# EAGLE board IBB v1.0 (EAGLE 7.5.0)
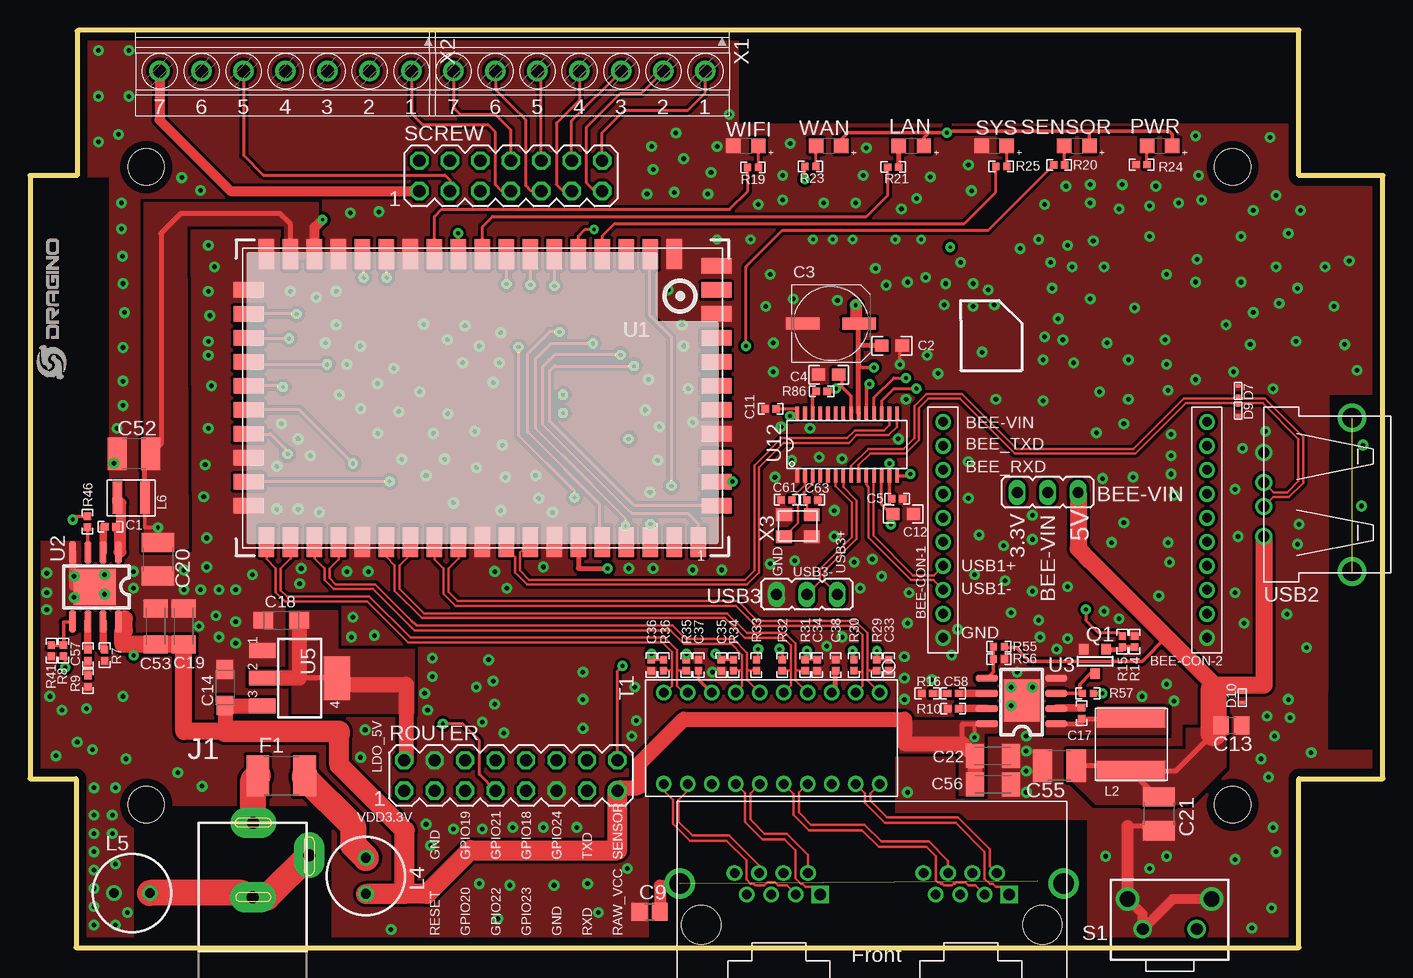
[diagram p0: board, top side]
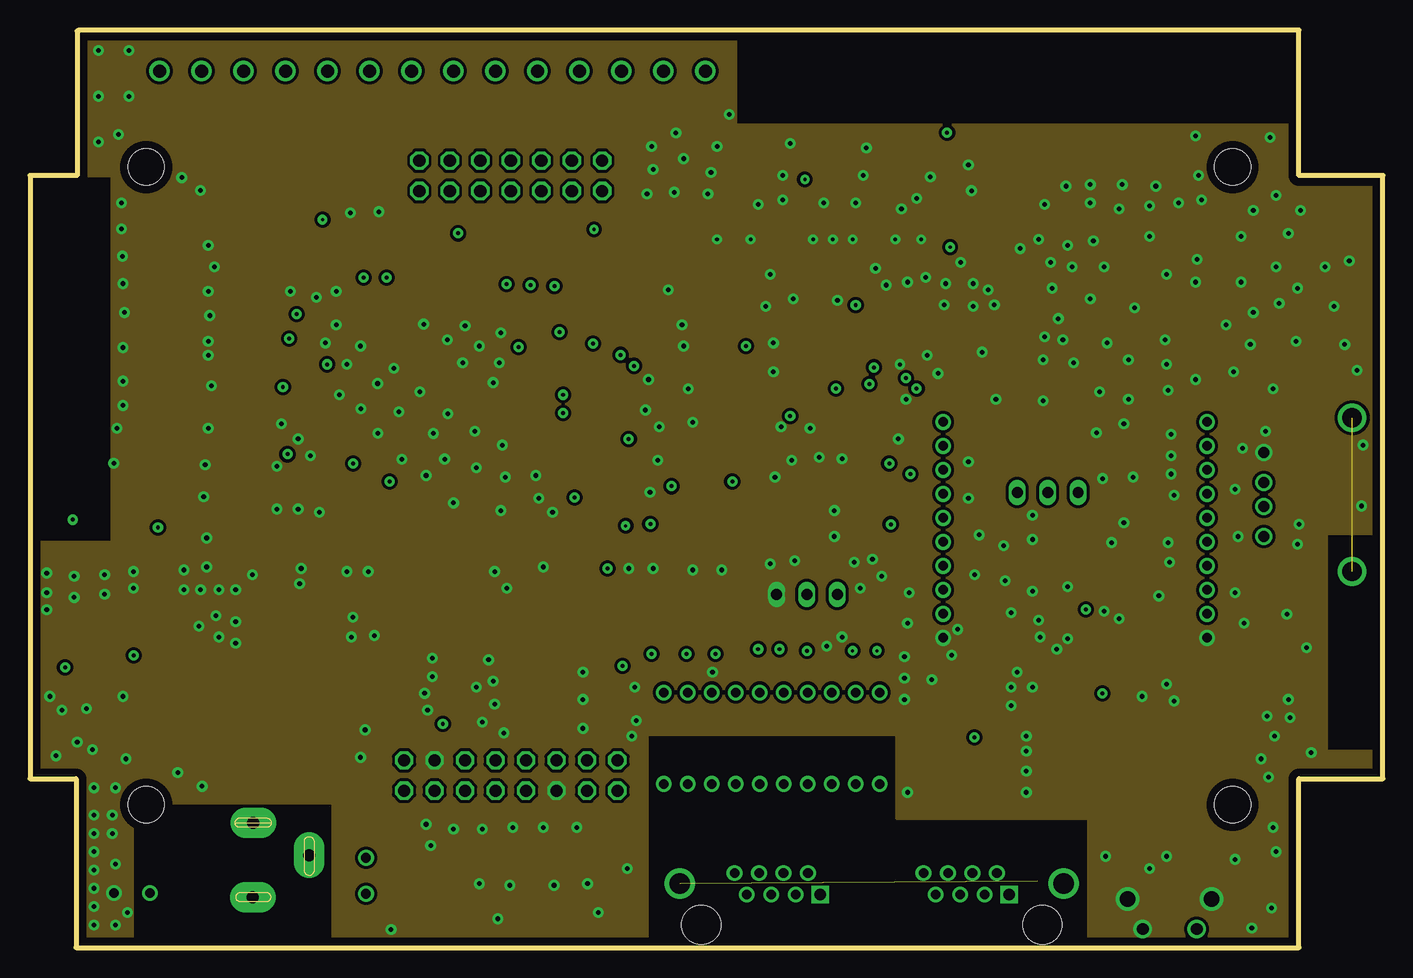
[diagram p1: board, inner layer Route2]
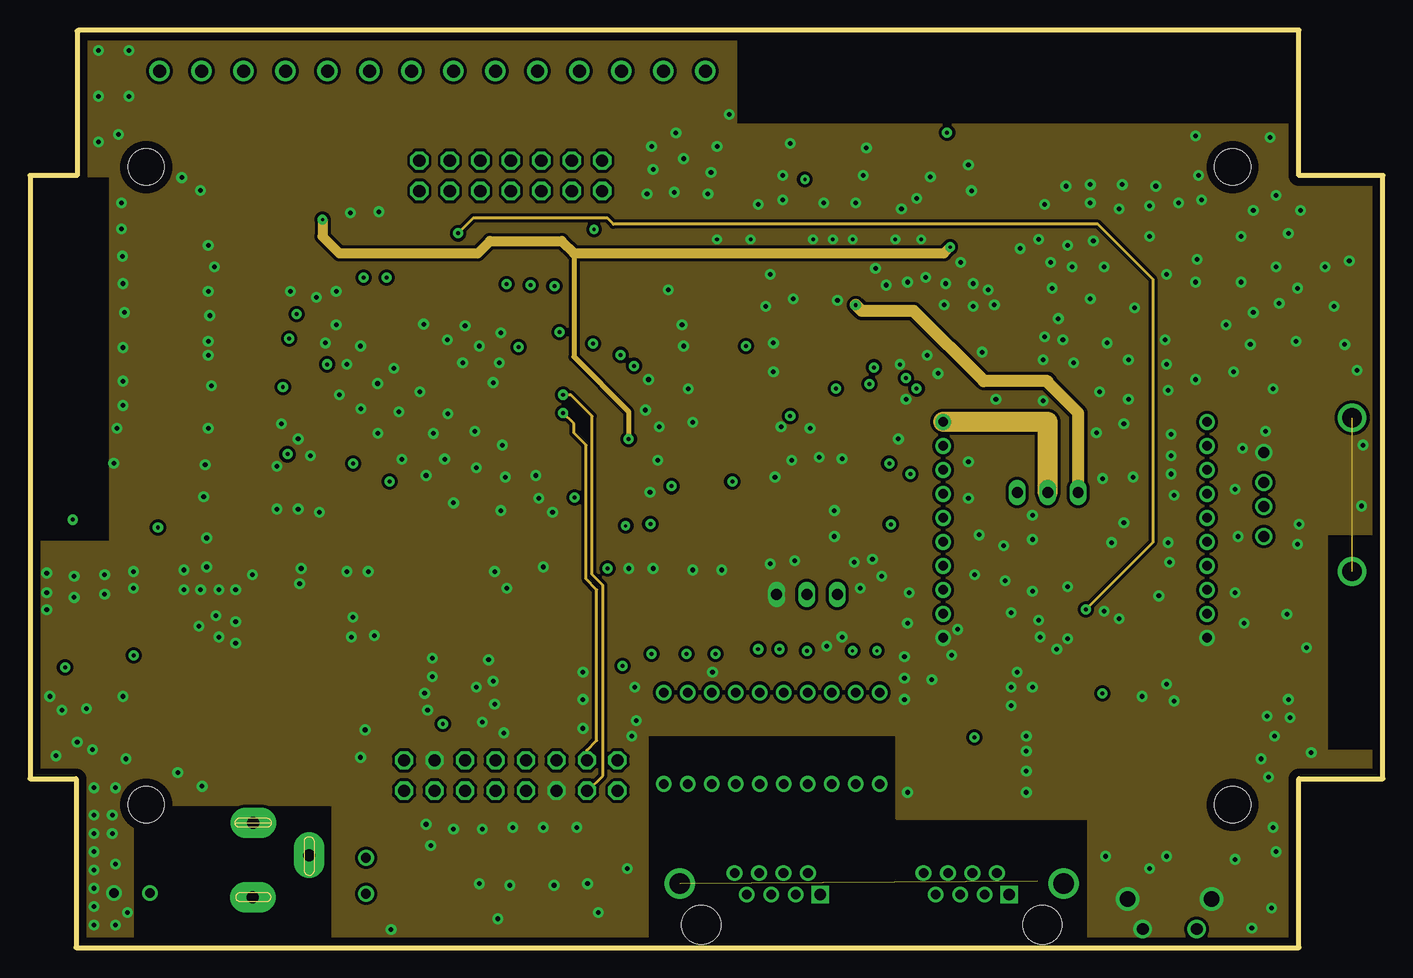
[diagram p2: board, inner layer Route15]
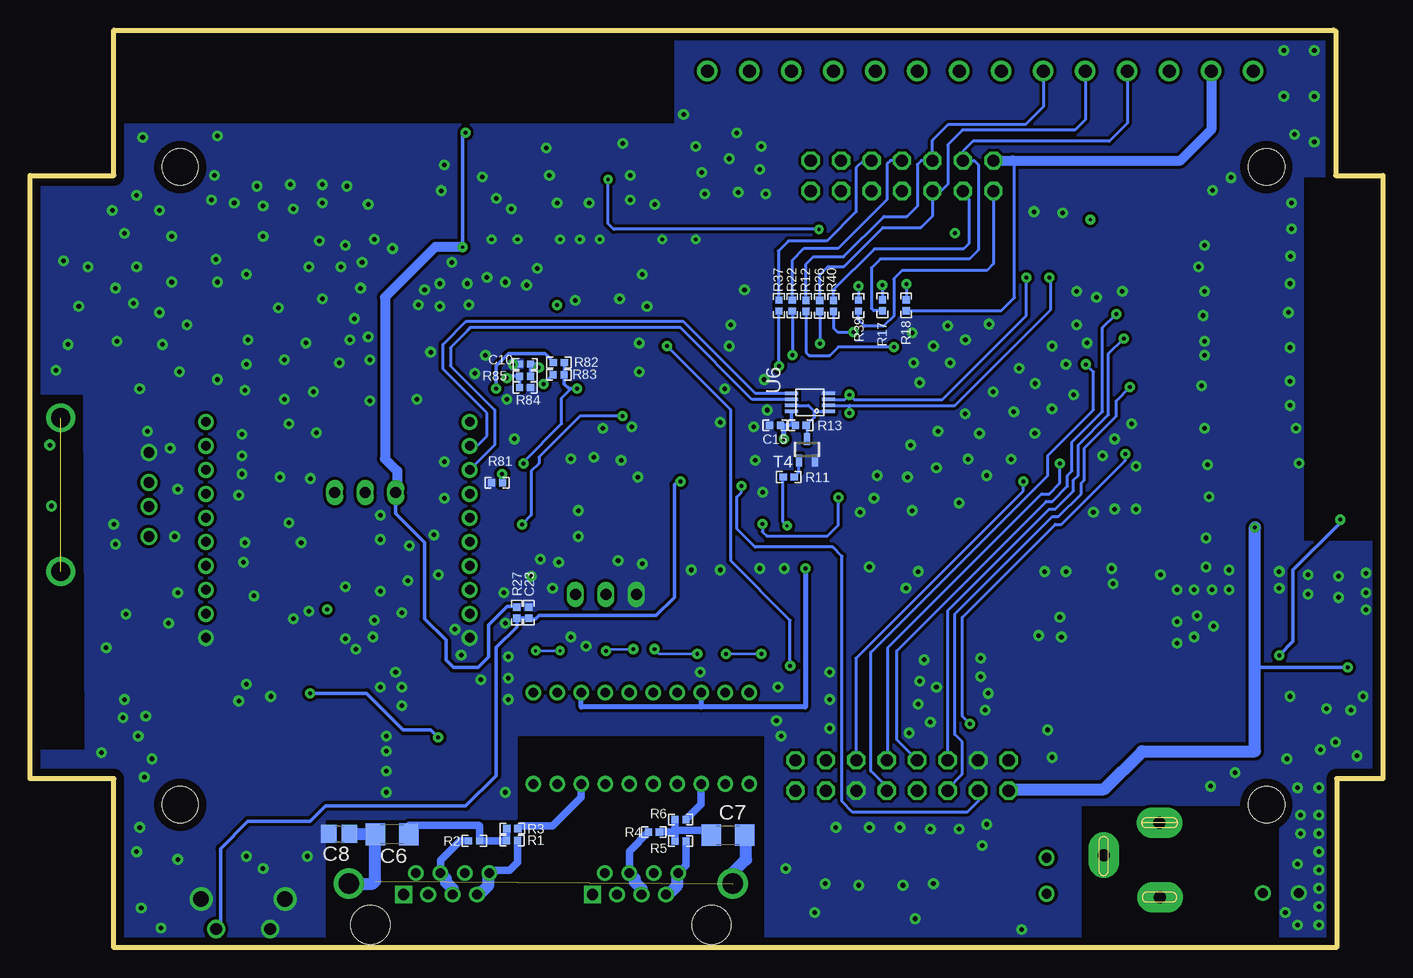
[diagram p3: board, bottom side, seen from below]

Size 112.78 x 76.5 mm. Coordinates in mm from the lower left corner, seen from the top.
Outline: 105.79,0 105.79,14.08 112.78,14.08 112.78,64.37 105.79,64.37 105.79,76.5 4.1,76.5 4.1,76.44 3.94,76.44 3.94,64.37 0,64.37 0,14.08 3.85,14.08 3.85,0 105.79,0
Copper layers (1*2+15*16): Top 0.035mm / dielectric 1.5mm / Route2 0.035mm / dielectric 0.15mm / Route15 0.035mm / dielectric 0.2mm / Bottom 0.035mm
Design rules "default *": minimum track width 5mil, minimum drill 10mil, track to track 8mil, track to pad 8mil, pad to pad 8mil, via to via 10mil, smd to smd 8mil, copper to edge 26mil, drill to drill 10mil, minimum pad ring 10mil, minimum via ring 10mil, stop-mask expansion 1mil, vias tented up to drill 30mil, thermal gap 10mil
Net classes: 0 default: clearance 0.205 mm; 1 power: width 0.61 mm, drill 0.406 mm, clearance 0.254 mm; 2 gnd: width 0.305 mm, drill 0.33 mm, clearance 0.254 mm; 3 usbvcc: width 0.508 mm, drill 0.61 mm, clearance 0.254 mm; 4 aref: width 0.406 mm, drill 0.61 mm, clearance 0.254 mm; 6 usbtrace-4layer: width 0.191 mm, clearance 0.203 mm
Holes 3 mm at 100.25,11.91 9.7,11.91 9.7,65.08 100.25,65.08
bRestrict: area 98.9,70.3 to 105,75.9

## Footprints (pad centres in the part's own frame; a part is rotated, then mirrored left to right if it is on the bottom)
10P-2.0MM = drill 0.8 pad 1.27: 1 0,9; 2 0,7; 3 0,5; 4 0,3; 5 0,1; 6 0,-1; 7 0,-3; 8 0,-5; 9 0,-7; 10 0,-9
JP2 = drill 0.914 long: 1 -2.54,0; 2 0,0; 3 2.54,0
C0402 = smd 0.61 x 0.61: 1 -0.457,0; 2 0.457,0
C0603 = smd 1.1 x 1: 1 -0.85,0; 2 0.85,0
UD-6,3X5,8_NICHICON = smd 2.8 x 1: + 2.35,0; - -2.35,0
C1206 = smd 1.6 x 1.8: 1 -1.4,0; 2 1.4,0
C0805 = smd 1.3 x 1.5: 1 -0.85,0; 2 0.85,0
SMC_A = smd 1.6 x 1.4: + -1.5,0; - 1.5,0
C1206K = smd 1.5 x 2: 1 -1.5,0; 2 1.5,0
C1210 = smd 1.6 x 2.7: 1 -1.4,0; 2 1.4,0
SOD−923 = smd 0.3 x 0.4: P$1 -0.45,0; P$2 0.45,0
L1812 = smd 1.9 x 3.4: 1 -1.95,0; 2 1.95,0
POWER_JACK_SLOT = drill 1 pad 2.54 long: GND@1 0,0; GND@2 4.7,3.5; PWR 0.04,6.2
ETHERNET-1X2 = drill 0.94 pad 1.27 square: 1-1 4.305,-2.54; 2-1 -11.445,-2.54 | drill 0.8: 1-2 5.325,-4.32; 1-3 6.345,-2.54; 1-4 7.365,-4.32; 1-5 8.385,-2.54; 1-6 9.405,-4.32; 1-7 10.425,-2.54; 1-8 11.445,-4.32; 2-2 -10.425,-4.32; 2-3 -9.405,-2.54; 2-4 -8.385,-4.32; 2-5 -7.365,-2.54; 2-6 -6.345,-4.32; 2-7 -5.325,-2.54; 2-8 -4.305,-4.32 | drill 1.7: S1 16,-3.43; S2 -16,-3.43 | hole 3.25: -14.225,0; 14.225,0
SWPA6028S = smd 5.7 x 1.7: P$1 0,2.25; P$2 0,-2.25
BS11 = drill 0.8: 1 -1.5,0; 2 1.5,0
SWPA3010S = smd 0.8 x 2.7: P$1 -1.15,0; P$2 1.15,0
CHIP-LED0805 = smd 1.2 x 1.2: A 0,-1.05; C 0,1.05
SOT-23 = smd 0.787 x 0.889: 1 0,-1.016; 2 -0.95,1.016; 3 0.95,1.016
R0402 = smd 0.61 x 0.61: 1 -0.457,0; 2 0.457,0
MA08-2 = drill 1.016 octagon: 1 -8.89,-1.27; 2 -8.89,1.27; 3 -6.35,-1.27; 4 -6.35,1.27; 5 -3.81,-1.27; 6 -3.81,1.27; 7 -1.27,-1.27; 8 -1.27,1.27; 9 1.27,-1.27; 10 1.27,1.27; 11 3.81,-1.27; 12 3.81,1.27; 13 6.35,-1.27; 14 6.35,1.27; 15 8.89,-1.27; 16 8.89,1.27
SWITCH_6X6X5 = drill 0.991 pad 1.524: 1 -2.25,0; 2 2.25,0 | drill 1.295 pad 1.905: 3 3.5,2.5; 4 -3.5,2.5
MA07-2 = drill 1.016 octagon: 1 -7.62,-1.27; 2 -7.62,1.27; 3 -5.08,-1.27; 4 -5.08,1.27; 5 -2.54,-1.27; 6 -2.54,1.27; 7 0,-1.27; 8 0,1.27; 9 2.54,-1.27; 10 2.54,1.27; 11 5.08,-1.27; 12 5.08,1.27; 13 7.62,-1.27; 14 7.62,1.27
RIONET_H2038 = drill 0.8: 1 -3.81,9; 2 -3.81,7; 3 -3.81,5; 4 -3.81,3; 5 -3.81,1; 6 -3.81,-1; 7 -3.81,-3; 8 -3.81,-5; 9 -3.81,-7; 10 -3.81,-9; 11 3.81,-9; 12 3.81,-7; 13 3.81,-5; 14 3.81,-3; 15 3.81,-1; 16 3.81,1; 17 3.81,3; 18 3.81,5; 19 3.81,7; 20 3.81,9
SOT323 = smd 0.5 x 1: 1 0,0.9; 2 -0.65,-0.9; 3 0.65,-0.9
DRAGINO_HE-4025 = smd 1.3 x 2.5: 1 -18,12; 2 -16,12; 3 -14,12; 4 -12,12; 5 -10,12; 6 -8,12; 7 -6,12; 8 -4,12; 9 -2,12; 10 0,12; 11 2,12; 12 4,12; 13 6,12; 14 8,12; 15 10,12; 16 12,12; 17 14,12; 18 16,12; 19 18,12; 30 18,-12; 31 16,-12; 32 14,-12; 33 12,-12; 34 10,-12; 35 8,-12; 36 6,-12; 37 4,-12; 38 2,-12; 39 0,-12; 40 -2,-12; 41 -4,-12; 42 -6,-12; 43 -8,-12; 44 -10,-12; 45 -12,-12; 46 -14,-12; 47 -16,-12 | smd 2.5 x 1.3: 20 19.5,9; 21 19.5,7; 22 19.5,5; 23 19.5,3; 24 19.5,1; 25 19.5,-1; 26 19.5,-3; 27 19.5,-5; 28 19.5,-7; 29 19.5,-9; 48 -19.5,-11; 49 -19.5,-9; 50 -19.5,-7; 51 -19.5,-5; 52 -19.5,-3; 53 -19.5,-1; 54 -19.5,1; 55 -19.5,3; 56 -19.5,5; 57 -19.5,7; 58 -19.5,9
RT8250-SOP8 = smd 1.88 x 0.61: 1 -1.219,0; 2 -1.219,-1.27; 3 -1.219,-2.54; 4 -1.219,-3.81; 5 4.547,-3.81; 6 4.547,-2.54; 7 4.547,-1.27; 8 4.547,0 | smd 2.997 x 3.505: 9 1.651,-1.956
SOT223 = smd 1.219 x 2.235: 1 -2.311,-3.099; 2 0,-3.099; 3 2.311,-3.099 | smd 3.6 x 2.2: 4 0,3.099
US8 = smd 0.3 x 1.1: 1 -0.75,-1.55; 2 -0.25,-1.55; 3 0.25,-1.55; 4 0.75,-1.55; 5 0.75,1.55; 6 0.25,1.55; 7 -0.25,1.55; 8 -0.75,1.55
USB_HUB_FE1.1S = smd 0.3 x 1.1: 1 -4.16,-2.6; 2 -3.52,-2.6; 3 -2.88,-2.6; 4 -2.24,-2.6; 5 -1.6,-2.6; 6 -0.96,-2.6; 7 -0.32,-2.6; 8 0.32,-2.6; 9 0.96,-2.6; 10 1.6,-2.6; 11 2.24,-2.6; 12 2.88,-2.6; 13 3.52,-2.6; 14 4.16,-2.6; 15 4.16,2.62; 16 3.52,2.62; 17 2.88,2.62; 18 2.24,2.62; 19 1.6,2.62; 20 0.96,2.62; 21 0.32,2.62; 22 -0.32,2.62; 23 -0.96,2.62; 24 -1.6,2.62; 25 -2.24,2.62; 26 -2.88,2.62; 27 -3.52,2.62; 28 -4.16,2.62
USB_C42562 = drill 0.9: 1 -3.5,5.29; 2 -1,5.29; 3 1,5.29; 4 3.5,5.29 | drill 1.6: 5 -6.4,-2.06; 6 6.4,-2.06
1751293 = drill 1.1 pad 1.7: 1 -10.5,-0.1; 2 -7,-0.1; 3 -3.5,-0.1; 4 0,-0.1; 5 3.5,-0.1; 6 7,-0.1; 7 10.5,-0.1
SMARTPRJ_CRYSTAL-3.2-2.5 = smd 1.3 x 1.05: 1 -1.15,-0.925; 2 1.15,-0.925; 3 1.15,0.925; 4 -1.15,0.925

## Placement (x,y rotation side)
BEE-CON-1  BEE-1  [10P-2.0MM]  76.12,34.82 0 top
BEE-CON-2  BEE-1  [10P-2.0MM]  98.12,34.82 180 top
BEE-VIN  1x3 , 2.54 弯针  [JP2]  84.84,37.96 0 top
C1  0.1u,50v  [C0402]  6.71,35.08 0 top
C2  10uf 10v  [C0603]  71.86,50.17 0 top
C3  100uF 16v TBD  [UD-6,3X5,8_NICHICON]  66.78,52.03 0 top
C4  10uf 10v  [C0603]  66.57,47.76 180 top
C5  0.1u  [C0402]  72.29,37.42 0 top
C6  1000pF,2kv  [C1206]  82.59,9.44 180 bottom
C7  1000pF,2kv  [C1206]  54.59,9.37 0 bottom
C8  0.1u,100V  [C0805]  87,9.48 0 bottom
C9  0.1u,100V  [C0805]  51.67,2.97 0 top
C10  0.1u  [C0402]  71.5,48.65 180 bottom
C11  0.1u  [C0402]  61.75,44.91 180 top
C12  10uf 10v  [C0603]  72.8,36.15 0 top
C13  10u,10V  [C0805]  100.15,18.52 0 top
C14  10uF,10V  [SMC_A]  16.26,21.7 90 top
C15  0.1u  [C0402]  50.67,43.54 180 bottom
C17  0.1u,50v  [C0402]  87.66,19.54 270 top
C18  10uF,10V  [SMC_A]  20.95,27.29 180 top
C19  10uf,50v  [C1206K]  12.83,26.78 90 top
C20  22uF,10v  [C1210]  10.67,32.37 270 top
C21  22uf,10v  [C1210]  94.11,11.16 270 top
C22  10uf,50v  [C1206K]  80.26,15.98 0 top
C23  1pf  [C0402]  71.2,27.92 90 bottom
C33  0.1u 10v  [C0402]  71.6,23.55 270 top
C34  0.1u 10v  [C0402]  65.64,23.55 270 top
C35  0.1u 10v  [C0402]  57.63,23.55 270 top
C36  0.1u 10v  [C0402]  51.79,23.55 270 top
C37  0.1u  [C0402]  55.73,23.55 90 top
C38  0.1u  [C0402]  67.16,23.55 90 top
C52  22uF,10v  [C1210]  8.66,41.16 180 top
C53  10uf,50v  [C1206K]  10.46,26.78 90 top
C55  22fu,10v  [C1210]  85.8,15.17 180 top
C56  10uf,50v  [C1206K]  80.29,13.6 0 top
C57  2.7nf  [C0402]  4.83,24.37 90 top
C58  2.7nf  [C0402]  76.96,21.19 0 top
C61  18pF  [C0402]  63.07,37.32 0 top
C63  18pF  [C0402]  65.23,37.32 180 top
D7  ESD7951ST5G  [SOD−923]  100.71,46.39 270 top
D9  ESD7951ST5G  [SOD−923]  100.71,44.79 90 top
D10  ESD7951ST5G  [SOD−923]  101.07,20.86 90 top
F1  2A  [L1812]  20.95,14.33 0 top
J1  POWER_JACKSLT  [POWER_JACK_SLOT]  18.58,4.21 0 top
J2  ETHERNET_2PORT  [ETHERNET-1X2]  70.18,1.89 180 top
L2  6.8uH / SWPA6045S6R8MT  [SWPA6028S]  91.8,16.95 0 top
L4  bead  [BS11]  28.02,5.98 90 top
L5  bead  [BS11]  8.51,4.55 0 top
L6  4.7uH /SWPA3015S4R7MT  [SWPA3010S]  8.43,37.5 0 top
LAN  GREEN  [CHIP-LED0805]  73.47,66.84 90 top
PWR  GREEN  [CHIP-LED0805]  94.17,66.84 90 top
Q1  BSS138-7-F  [SOT-23]  88.77,23.86 0 top
R1  75  [R0402]  72.59,8.91 0 bottom
R2  75  [R0402]  75.75,8.9 180 bottom
R3  75  [R0402]  72.57,9.91 180 bottom
R4  75  [R0402]  60.76,9.63 180 bottom
R5  75  [R0402]  58.55,8.87 0 bottom
R6  75  [R0402]  58.55,10.67 180 bottom
R7  180K  [R0402]  6.22,24.37 270 top
R8  75K 1%  [R0402]  2.79,24.75 270 top
R9  16K 1%  [R0402]  4.83,22.21 90 top
R10  180K  [R0402]  76.96,19.92 180 top
R11  4.7K  [R0402]  49.53,39.23 180 bottom
R12  0R  [R0402]  48.08,53.5 270 bottom
R13  100K  [R0402]  48.51,43.54 180 bottom
R14  47K,NL  [R0402]  92.08,25.51 270 top
R15  4.7k  [R0402]  91.06,25.51 270 top
R16  24K  [R0402]  74.8,21.19 180 top
R17  0R  [R0402]  41.71,53.55 90 bottom
R18  0R  [R0402]  39.73,53.55 90 bottom
R19  270  [R0402]  60.27,65.03 0 top
R20  330  [R0402]  85.78,65.24 0 top
R21  330  [R0402]  71.97,65.07 0 top
R22  0R  [R0402]  49.23,53.53 270 bottom
R23  330  [R0402]  65.06,65.13 0 top
R24  330  [R0402]  92.66,65.27 0 top
R25  270  [R0402]  80.97,65.13 0 top
R26  0R  [R0402]  46.94,53.5 90 bottom
R27  10K  [R0402]  72.19,27.92 270 bottom
R29  49.9  [R0402]  70.59,23.55 90 top
R30  49.9  [R0402]  68.68,23.55 90 top
R31  49.9  [R0402]  64.62,23.55 90 top
R32  49.9  [R0402]  62.71,23.55 90 top
R33  49.9  [R0402]  60.56,23.55 90 top
R34  49.9  [R0402]  58.65,23.55 90 top
R35  49.9  [R0402]  54.71,23.55 90 top
R36  49.9  [R0402]  52.81,23.55 90 top
R37  0R  [R0402]  50.34,53.53 270 bottom
R39  0R  [R0402]  43.71,53.53 270 bottom
R40  0R  [R0402]  45.8,53.5 90 bottom
R41  24K 1%  [R0402]  1.78,24.75 90 top
R46  100K  [R0402]  4.8,35.49 270 top
R55  53.6K 1%  [R0402]  80.77,25.08 0 top
R56  10K 1%  [R0402]  80.77,24.04 180 top
R57  100K  [R0402]  88.19,21.19 0 top
R81  2.7K 1%  [R0402]  73.84,38.74 0 bottom
R82  100k  [R0402]  68.68,48.78 0 bottom
R83  100k  [R0402]  68.71,47.76 0 bottom
R84  100k  [R0402]  71.5,46.69 180 bottom
R85  47K  [R0402]  71.5,47.63 0 bottom
R86  100k  [R0402]  65.99,46.36 0 top
ROUTER  [MA08-2]  40.08,14.34 0 top
S1  [SWITCH_6X6X5]  95.01,1.54 0 top
SCREW  [MA07-2]  40.08,64.34 0 top
SENSOR  GREEN  [CHIP-LED0805]  87.27,66.84 90 top
SYS  GREEN  [CHIP-LED0805]  80.37,66.84 90 top
T1  RJ45_TRANSFORMER_HST2038DR  [RIONET_H2038]  61.83,17.45 270 top
T4  2SC4081/SC70  [SOT323]  48.01,41.51 0 bottom
U1  DRAGINO_HE-4025  [DRAGINO_HE-4025]  37.72,45.83 180 top
U2  RT7272  [RT8250-SOP8]  7.37,31.73 270 top
U3  RT7272  [RT8250-SOP8]  84.33,18.65 180 top
U5  BL1117-50CX  [SOT223]  22.48,22.46 270 top
U6  NC7WZ125  [US8]  47.75,45.45 90 bottom
U12  USB_HUB_FE1.1S  [USB_HUB_FE1.1S]  68.12,41.92 0 top
U$2  [SMA-JACK]  6.99,18.52 270 top
U$6  [SMA-JACK]  6.99,59.16 270 top
U$7  [SMA-JACK]  6.99,44.56 180 top
U$8  [SMA-JACK]  6.99,40.11 270 top
U$10  [SMA-JACK]  40,7.09 0 top
U$11  [LOGO-SILK-NEW]  3.02,47.38 90 top
USB2  USB_C42562  [USB_C42562]  108.15,37.77 90 top
USB3  1x3 , 2.54 排母  [JP2]  64.77,29.45 0 top
WAN  GREEN  [CHIP-LED0805]  66.58,66.84 90 top
WIFI  GREEN  [CHIP-LED0805]  59.68,66.84 90 top
X1  1751293  [1751293]  45.8,72.97 180 top
X2  1751293  [1751293]  21.3,72.97 180 top
X3  12Mhz,X322512MMB4SI  [SMARTPRJ_CRYSTAL-3.2-2.5]  64.01,35.16 180 top

## Library data of the parts
BEE-CON-1 BEE-CON-2 C2 C4 C5 C10-C12 C15 C61 C63 L2 U$2 U$6-U$8 U$10 USB2 X3 = dragino-passive
BEE-VIN C1 C3 C6-C9 C13 C17 C19-C23 C33-C38 C52 C53 C55-C58 D7 D9 D10 F1 J1 J2 L6 LAN PWR R1-R27 R29-R37 R39-R41 R46 R55-R57 R81-R86 S1 SENSOR SYS T1 U1-U3 U6 U12 U$11 USB3 WAN WIFI = dragino
C14 C18 = rcl
L4 L5 = inductor-neosid; OC_FARNELL: unknown; OC_NEWARK: unknown
Q1 ROUTER SCREW = dragino; OC_FARNELL: unknown; OC_NEWARK: unknown
T4 = zetex; MPN: DSS4160U-7; OC_FARNELL: 1710696; OC_NEWARK: 25R4558
U5 = linear
X1 X2 = con-phoenix-350; OC_FARNELL: unknown; OC_NEWARK: unknown

## Nets
1: R18.1 SCREW.2 X2.6
2.0V_CTL: C37.1 C38.1 T1.3 T1.8 U1.6
5V_LDO: C18.+ ROUTER.2 U5.2 U5.4
+3V3: BEE-VIN.1 C15.1 C20.1 C52.1 L6.P$2 LAN.A PWR.A R8.2 R13.2 R27.1 ROUTER.1 SENSOR.A U1.31 U1.32 U6.8 WAN.A
+5V: BEE-VIN.3 C2.1 C3.+ C10.1 C13.1 C21.1 C55.1 D10.P$2 L2.P$2 R55.2 R85.2 U12.20 USB2.1
/BEE_OE: R13.1 T4.1 U6.1 U6.7
/RESET_HE: ROUTER.3 U1.46
AGND: C6.2 C7.2 C8.2 C9.2 J2.S1 J2.S2
BEE-RXD: BEE-CON-1.3 U6.6
BEE-TXD: BEE-CON-1.2 U6.5
BEE-VIN: BEE-CON-1.1 BEE-VIN.2
CLK_N: C63.2 U12.3 X3.1
CLK_P: C61.2 U12.2 X3.3
GND [gnd]: BEE-CON-1.10 BEE-CON-2.1 C2.2 C3.- C4.2 C5.2 C8.1 C9.1 C10.2 C11.2 C12.2 C13.2 C14.- C15.2 C18.- C19.2 C20.2 C21.2 C22.2 C23.2 C33.2 C34.2 C35.2 C36.2 C37.2 C38.2 C52.2 C53.2 C55.2 C56.2 C61.1 C63.1 D7.P$1 D9.P$1 D10.P$1 L5.1 Q1.2 R7.2 R9.1 R10.2 R14.1 R16.2 R24.1 R41.1 R56.1 R81.1 R84.1 ROUTER.4 ROUTER.11 S1.1 S1.3 S1.4 SYS.C T4.3 U1.7 U1.10 U1.15 U1.20 U1.22 U1.29 U1.30 U1.33 U1.36 U1.47 U1.48 U1.50 U1.55 U2.4 U2.9 U3.4 U3.9 U5.1 U6.4 U12.1 USB2.4 USB3.1 WIFI.C X3.2 X3.4
GPIO1: R15.1 U1.38
GPIO6: R22.2 U1.1
GPIO7: R37.2 U1.58
GPIO8: R12.2 U1.3
GPIO14: R18.2 U1.40
GPIO15: R17.2 U1.41
GPIO16: R39.1 U1.42
GPIO18: ROUTER.10 U1.24
GPIO19: ROUTER.6 U1.27
GPIO20: ROUTER.5 U1.25
GPIO21: ROUTER.8 U1.28
GPIO22: ROUTER.7 U1.23
GPIO23: ROUTER.9 U1.26
GPIO24: ROUTER.12 U1.21
GPIO26: R40.1 U1.5
GPIO27: R11.2 R26.1 U1.4
JUMPSTART: C23.1 R27.2 S1.2 U1.57
LAN_LED: R21.1 U1.39
LED_SYS: R25.1 U1.44
N$1: R25.2 SYS.A
N$2: J1.GND@1 J1.GND@2 L5.2
N$3: F1.2 L4.2
N$4: R11.1 T4.2
N$5: SCREW.7 X2.1
N$6: R39.2 SCREW.1 X2.7
N$7: R6.1 T1.13
N$8: SCREW.9 X1.6
N$9: SCREW.11 X1.4
N$10: SCREW.13 X1.2
N$11: SCREW.12 X1.3
N$12: F1.1 J1.PWR
N$13: R20.2 SENSOR.C
N$14: SCREW.14 X1.1
N$16: Q1.1 R57.1 U3.3
N$17: R10.1 U3.7
N$18: R86.1 U12.26
N$19: Q1.3 R14.2 R15.2
N$20: C58.2 U3.6
N$22 [gnd]: R55.1 R56.2 U3.5
N$23: R19.2 WIFI.A
N$24: C1.2 L6.P$1 U2.1
N$25: R46.2 U2.3
N$26: R7.1 U2.7
N$27: C1.1 U2.2
N$28: R22.1 SCREW.8 X1.7
N$29: C57.1 R9.2
N$30: LAN.C R21.2
N$31: C57.2 U2.6
N$32: C58.1 R16.1
N$34: C17.2 L2.P$1 U3.1
N$35: PWR.C R24.2
N$36: R37.1 SCREW.10 X1.5
N$39: C35.1 R33.2 R34.2
N$40: C36.1 R35.2 R36.2
N$41: J2.2-7 J2.2-8 R1.2
N$42: J2.2-4 J2.2-5 R2.2
N$43: C33.1 R29.2 R30.2
N$44: C34.1 R31.2 R32.2
N$45: R3.1 T1.18
N$46: C6.1 R1.1 R2.1 R3.2
N$49: R8.1 R41.2 U2.5
N$50: R17.1 SCREW.4 X2.4
N$51: J2.1-7 J2.1-8 R5.2
N$52: J2.1-4 J2.1-5 R4.2
N$53: R12.1 SCREW.6 X2.2
N$54: C7.1 R4.1 R5.1 R6.2
N$55: C17.1 U3.2
N$58: R40.2 SCREW.3 X2.5
N$59: R26.2 SCREW.5 X2.3
N$109: R81.2 U12.14
N$111: R82.1 U12.17
N$112: R83.1 U12.19
N$113: R84.2 R85.1 U12.18
NET_LED: BEE-CON-2.3
OPTIONAL_ANT: U1.49
P0_R_N: J2.2-6 T1.17
P0_R_P: J2.2-3 T1.16
P0_RX_N: R31.1 T1.4 U1.13
P0_RX_P: R32.1 T1.5 U1.14
P0_T_N: J2.2-2 T1.20
P0_T_P: J2.2-1 T1.19
P0_TX_N: R29.1 T1.1 U1.11
P0_TX_P: R30.1 T1.2 U1.12
P4_R_N: J2.1-6 T1.12
P4_R_P: J2.1-3 T1.11
P4_RX_N: R35.1 T1.9 U1.18
P4_RX_P: R36.1 T1.10 U1.19
P4_T_N: J2.1-2 T1.15
P4_T_P: J2.1-1 T1.14
P4_TX_N: R33.1 T1.6 U1.16
P4_TX_P: R34.1 T1.7 U1.17
RF_CSN: U1.52
RF_MISO: U1.56
RF_MOSI: U1.54
RF_RESET: U1.51
RF_SCK: U1.53
SENSOR_LED: R20.1 ROUTER.16
SIM_CLK: BEE-CON-1.9
UART_RX: ROUTER.13 U1.35 U6.3
UART_TX: ROUTER.14 U1.34 U6.2
USB1_N: BEE-CON-1.8 U12.10
USB1_P: BEE-CON-1.7 U12.11
USB2_N [usbtrace-4layer]: D7.P$2 U12.8 USB2.2
USB2_P [usbtrace-4layer]: D9.P$2 U12.9 USB2.3
USB3.3: C4.1 C5.1 R82.2 R83.2 R86.2 U12.13 U12.21
USB3_N: U12.6 USB3.2
USB3_P: U12.7 USB3.3
USB4_N: U12.4
USB4_P: U12.5
USB_GND [gnd]: USB2.5 USB2.6
USB_N: U1.9 U12.15
USB_P: U1.8 U12.16
VCC18: C11.1 C12.1 U12.12 U12.28
VIN: C14.+ C19.1 C22.1 C53.1 C56.1 L4.1 R46.1 R57.2 ROUTER.15 U2.8 U3.8 U5.3
WAN_LED: R23.1 U1.43
WLAN_LED: R19.1 U1.37
YELLOW: R23.2 WAN.C

## Tracks (layer width: path | path; a pad name or v marks a point on that pad's centre or on a via)
1
  Bottom 0.254: R18.1 31.8,53.09 30.71,54.19 30.71,65.46 30.86,65.61 | SCREW.2
  Bottom 0.813: X2.6 14.3,68.18 16.87,65.61 30.86,65.61 SCREW.2
2.0V_CTL  (via drill 0.33)
  Top 0.305: C37.1 55.73,22.36 T1.8
  Top 0.406: T1.3 67.16,21.26 C38.1 | U1.6 45.72,31.61 v48.13,31.61
  Bottom 0.406: T1.8 56.83,20.05 | 56.83,20.05 66.83,20.05 T1.3 | v48.13,31.61 48.13,20.05 56.83,20.05
5V_LDO
  Top 0.406: U5.4 22.23,22.46
  Top 1.27: U5.2 22.23,22.46 22.48,22.46 22.48,27.29 C18.+ | U5.4 25.58,21.95 31.37,21.95 31.37,15.61 ROUTER.2
  pour Top (no thermals): 21.59,28.05 25.65,28.05 25.65,24.87 32,24.87 32,19.54 21.84,19.54 21.84,21.95 18.29,21.95 18.29,23.1 21.59,23.1
+3V3  (via drill 0.25 pad 0.81, 0.33)
  Top 0.305: C20.1 v10.67,35.03 9.58,35.03 L6.P$2 | R8.2 2.92,24.29 v2.92,23.35 | 74.93,67.93 v76.45,67.93 76.58,68.05 88.39,68.05 | 74.93,67.93 68.2,67.93 67.69,67.42 67.69,66.9 WAN.A | LAN.A 74.53,67.52 74.93,67.93 | PWR.A 95.22,67.83 95,68.05 88.39,68.05 | SENSOR.A 88.32,67.98 88.39,68.05
  Top 0.406: U1.31 21.72,60.31 20.83,61.2 12.57,61.2 10.92,59.55 10.92,42.02 C52.1 9.58,40.68 L6.P$2
  Top 0.813: U1.32 23.72,60.02 v24.38,60.69
  Route15 0.406: 45.34,57.89 45.34,49.26 49.91,44.69 v49.91,42.4
  Route15 0.813: v24.38,60.69 24.38,59.29 25.78,57.89 37.34,57.89 38.35,58.91 44.32,58.91 45.34,57.89 76.2,57.89 v76.71,58.4
  Bottom 0.305: 10.67,28.94 v10.67,35.03 | v2.92,23.35 10.67,23.35 10.67,23.48 | U6.8 49.3,43.87 R13.2 C15.1 | v76.71,58.4 76.71,67.67 v76.45,67.93 | BEE-VIN.1 82.3,36.18 79.88,33.76 79.88,27.41 78.11,25.64 78.11,23.99 77.47,23.35 75.44,23.35 74.55,24.24 74.55,26.91 73.03,28.43 72.24,28.43 R27.1
  Bottom 0.406: v49.91,42.4 49.91,43.24 C15.1
  Bottom 0.813: v76.71,58.4 78.99,58.4 83.19,54.21 83.19,40.75 82.17,39.73 82.17,38.08 BEE-VIN.1
  Bottom 1.016: ROUTER.1 31.07,13.19 23.24,13.19 20.07,16.37 10.67,16.37 10.67,23.48 v10.67,35.03
  pour Top (no thermals): 9.53,33.26 13.21,33.26 13.08,60.18 21.21,60.18 21.21,57.39 24,57.39 24,62.09 9.53,62.09
+5V  (via drill 0.33)
  Top 0.254: C13.1 99.19,18.52 98.68,19.03 | 91.69,28.18 92.46,28.18
  Top 0.305: 69.23,51.93 C3.+ | v70.36,48.37 69.34,48.37 69.08,48.62 | D10.P$2 101.07,21.87 101.09,21.87 | 88.33,32.18 88.45,32.18 | 94.74,25.89 92.71,23.86 83.31,23.86 82.17,25 81.31,25 R55.2
  Top 0.406: U12.20 69.08,48.62 69.08,50.27 | 69.08,50.27 69.08,51.98 C3.+ | C2.1 69.18,50.17 69.08,50.27 | C55.1 91.8,15.17 L2.P$2 | 98.68,17.89 95.49,14.7 L2.P$2 | L2.P$2 93.94,12.56 C21.1
  Top 1.016: v68.83,53.58 68.83,52.32 C3.+
  Top 1.422: 98.93,21.7 99.11,21.87 101.09,21.87 102.86,21.87 USB2.1 | 98.93,21.7 98.68,21.45 | BEE-VIN.3 87.38,33.26 88.45,32.18 92.46,28.18 94.74,25.89 98.93,21.7
  Top 2.184: 98.68,17.89 98.68,19.03 98.68,21.45
  Route15 1.016: BEE-VIN.3 87.38,44.56 84.71,47.23 | 84.84,47.23 84.71,47.23 | 84.71,47.23 79.5,47.23 73.66,53.07 69.34,53.07 v68.83,53.58
  Bottom 0.305: R85.2 C10.1 70.64,48.65 v70.36,48.37
  pour Top (no thermals): 86.61,16.49 96.39,16.49 96.39,18.27 99.7,18.27 99.7,15.1 96.52,11.92 88.9,11.92 86.61,14.21 86.61,16.37
/BEE_OE
  Bottom 0.254: U6.7 47.88,45.2 47.37,44.69 | 47.37,44.69 U6.1 | 47.37,44.69 47.37,44.23 R13.1 48.01,43.49 T4.1
/RESET_HE  (via drill 0.33)
  Top 0.254: 51.56,57.67 U1.46 51.69,57.8 51.69,52.69 53.47,50.91 v53.47,38.46
  Bottom 0.254: ROUTER.3 33.73,12.23 34.67,11.29 44.2,11.29 45.09,12.17 45.09,32.62 45.85,33.38 52.32,33.38 53.85,34.91 53.85,37.57 53.47,37.96 v53.47,38.46
AGND  (1 unrouted)
  Top 1.016: C9.2 52.52,5.15 54.02,5.15 J2.S1
  Bottom 1.016: J2.S1 54.18,6.25 53.09,7.35 53.09,9.27 C7.2 | C8.2 86.11,9.44 C6.2 83.99,5.53 84.2,5.32 J2.S2
BEE-RXD
  Bottom 0.254: U6.6 52.57,45.7 58.55,51.67 76.07,51.67 76.26,51.48 77.72,50.02 77.72,48.5 74.04,44.81 74.04,41.9 BEE-CON-1.3
BEE-TXD
  Bottom 0.254: U6.5 52.31,46.2 58.29,52.18 76.45,52.18 78.36,50.27 78.36,48.24 74.68,44.56 74.68,42.65 75.51,41.82 BEE-CON-1.2
BEE-VIN
  Route15 1.676: BEE-VIN.2 84.84,43.82 BEE-CON-1.1
CLK_N
  Top 0.203: X3.1 64.77,36.47 C63.2 64.53,37.56 64.53,37.94 65.24,38.65 U12.3
CLK_P
  Top 0.203: X3.3 64.01,35.39 64.01,36.81 63.53,37.3 C61.2 63.53,37.51 64.6,38.58 U12.2
GND  (via drill 0.3, 0.33, 0.38)
  Top 0.254: v72.52,48.62 72.52,49.98 C2.2
  Top 0.406: 91.51,10.14 93.72,10.14 C21.2
  Top 0.61: U2.4 3.56,30.08 U2.9
  Top 0.813: S1.4 92.76,2.79 S1.1 95.26,4.04 S1.3
  Top 1.016: S1.4 91.51,10.14
  Bottom 0.254: C10.2 72.49,48.65 v72.52,48.62
  other vias: 27.56,15.86 7.62,62.09 5.71,67.17 5.71,70.98 5.71,74.79 8.26,70.98 8.26,74.79 66.42,25.13 56.9,22.97 86.87,56.75 85.09,57.13 86.49,58.53 88.65,58.91 57.28,66.78 84.07,59.04 94.87,46.46 86.11,50.66 89.54,56.75 93.34,59.29 93.34,61.83 97.28,57.39 100.97,59.29 100.97,55.48 97.16,55.48 97.16,47.35 67.69,40.75 7.11,1.89 8.13,2.9 7.11,6.97 6.86,9.51 7.11,13.32 5.33,1.89 5.33,3.41 5.33,4.94 5.33,6.46 5.33,7.98 5.33,9.51 5.33,11.03 6.86,11.03 5.33,13.32 104.9,59.55 109.98,57.26 108.71,53.45 105.66,54.97 111.12,41.89 109.6,50.27 111,36.81 95,32.11 95.12,41 95.12,39.48 81.15,33.51 81.28,30.59 83.57,36.05 78.23,40.5 78.23,37.45 79.12,34.4 78.74,31.1 73.15,12.94 103.51,3.28 103.89,7.98 101.22,27.03 103.89,62.72 63.63,54.08 65.28,59.04 78.23,65.26 70.48,56.62 74.68,55.86 77.6,57.13 76.33,55.35 73.15,55.48 67.31,53.96 61.98,47.99 62.61,43.42 62.1,39.23 63.5,40.62 65.79,40.88 65.02,43.29 73.15,27.03 67.06,34.27 63.75,32.24 61.72,31.99 67.06,36.43 7.62,59.93 7.75,47.23 7.24,43.29 7.75,50.02 6.99,40.37 27.94,18.14 33.02,10.27 73.28,29.57 70.99,30.97 67.69,25.89 69.22,29.95 38.99,2.4 40,5.19 43.69,5.19 46.48,5.32 47.37,2.9 42.8,10.02 45.59,10.02 40.26,10.02 37.72,9.89 35.31,9.89 49.78,6.59 2.67,19.79 3.94,17.13 8,15.73 12.32,14.59 14.35,13.44 7.75,45.19 54.36,51.93 58.29,69.45 53.85,67.93 73.03,45.7 72.39,42.4 72.9,20.68 76.83,24.37 77.34,26.53 72.9,24.24 72.9,22.46 83.57,34.02 83.57,29.7 90.17,33.76 94.87,33.76 95.38,37.7 91.95,39.23 95.12,42.78 89.41,39.1 80.52,45.7 78.61,55.35 82.55,58.28 79.88,54.85 80.39,53.58 78.61,53.45 76.2,53.58 88.39,62.09 88.39,63.61 91.06,63.61 95.76,62.09 93.85,63.48 101.98,61.45 97.66,62.34 105.92,61.45 103.38,67.55 97.16,67.67 97.41,64.37 94.74,7.6 93.34,6.59 89.66,7.6 100.46,7.35 103.63,10.02 101.85,1.63 103.25,14.21 99.7,51.93 94.74,56.12 103.89,56.75 107.95,56.75 79.38,49.64 75.69,47.86 74.8,49.39 84.45,45.58 84.45,49 84.58,50.91 85.73,52.43 85.22,54.97 71.37,55.23 26.8,25.89 15.75,25.89 17.14,27.16 17.14,25.38 15.49,27.67 14.22,29.83 17.14,29.83 14.1,26.78 15.75,29.83 94.74,48.62 94.62,50.66 104.14,53.7 100.33,47.99 101.98,52.94 110.62,48.12 90.81,61.58 6.22,31.1 6.22,29.45 3.68,30.97 3.68,29.19 8.64,29.95 8.64,31.35 12.83,29.83 12.83,31.48 1.4,31.22 1.4,29.57 1.4,28.18 1.65,20.94 83.06,12.94 83.06,14.71 83.06,16.37 83.06,17.64 81.79,20.18 81.79,21.7 83.57,21.7 82.3,22.97 81.79,27.92 84.2,25.89 86.49,25.76 85.6,24.87 75.18,22.33 89.54,28.05 90.81,27.41 103.63,46.59 7.37,67.8 7.7,57.64 7.75,55.35 7.87,52.94 14.86,58.53 14.86,54.72 14.86,50.53 14.99,52.69 15.11,46.85 14.86,49.39 14.86,43.29 14.61,40.24 14.48,37.57 14.73,34.15 14.73,31.73 18.54,31.1 5.21,16.49 7.75,20.94 2.16,15.98 4.7,19.92 30.1,1.51 37.47,5.32 33.4,8.49 20.95,43.67 23.37,41 22.35,42.4 20.57,40.11 20.57,36.56 22.35,36.56 24.13,36.3 22.48,30.34 22.61,31.61 26.42,31.35 28.19,31.35 26.92,27.54 28.7,26.02 33.15,19.79 32.89,21.19 33.53,22.59 33.53,24.11 37.72,18.78 38.73,20.3 38.61,22.21 38.23,23.99 37.21,21.7 39.5,17.89 46.1,18.27 46.1,20.68 46.1,22.97 38.73,31.35 39.75,29.95 15.37,56.75 21.72,54.72 23.88,54.21 25.53,54.72 25.53,51.93 27.56,50.15 27.58,44.91 25.78,46.08 26.42,48.62 24.64,50.4 28.98,47.02 33.63,42.86 29.01,42.88 30.76,44.66 33.02,39.35 37.21,39.99 37.08,43.04 39.62,39.23 42.42,37.45 35.31,37.07 39.24,36.43 30.99,40.7 43.56,36.3 42.16,39.35 39.37,41.89 51.69,37.96 52.32,40.62 51.31,44.81 52.45,43.42 34.8,50.66 36.07,48.75 38.61,47.1 51.56,47.35 53.21,54.85 54.48,50.15 54.86,46.59 55.25,43.8 49.91,31.61 51.94,31.61 55.25,31.48 57.66,31.48 42.8,31.73 50.17,17.64 50.55,18.91 50.42,21.7 92.71,20.94 94.74,21.95 95.38,20.56 84.07,27.29 91.19,35.42 94.11,29.32 86.49,30.08 103.76,17.64 105.03,19.16 106.81,16.24 102.62,15.73 103.12,19.29 104.9,20.68 106.43,25 104.78,27.8 105.66,33.64 105.79,35.29 100.46,29.57 100.71,34.27 100.46,38.21 101.09,41.64 103,43.04 88.9,42.91 91.19,43.67 87,48.75 89.15,46.34 89.79,50.4 88.39,54.08 92.08,53.32 91.57,45.7 91.57,49 84.58,61.96 86.36,63.48 78.49,63.1 72.64,61.58 73.91,62.47 75.06,64.24 69.72,66.66 69.47,64.37 68.83,62.09 66.17,62.09 60.71,61.96 62.74,62.34 62.74,64.37 63.37,67.04 51.82,66.78 51.94,64.88 54.48,65.77 51.44,62.85 53.72,62.97 56.52,62.85 56.77,64.62 61.34,53.45 61.72,56.12 61.98,50.4 105.54,50.53 101.73,50.27 66.93,59.04 68.58,59.04 72.14,59.04 74.3,59.04 57.28,59.04 60.07,59.04 68.71,32.11 70.23,32.37 32.82,51.98 36.27,51.82 37.47,50.15 39.12,48.75 39.24,51.24 26.7,61.25 29.08,61.35 12.65,64.19 14.2,63.13 34.57,40.72 30.33,48.29 32.49,46.34 34.82,44.51
  pour Top (rank 2, no thermals): 113.92,-1.29 113.92,16.37 108.08,16.37 108.2,46.21 114.05,46.21 113.92,68.56 58.93,68.56 58.93,75.67 -4.7,75.67 -4.7,64.37 6.73,64.37 6.73,33.76 -4.7,33.76 -4.7,-1.03 8.51,-1.16 8.51,11.92 25.27,11.92 25.27,-1.16 51.44,-1.16 51.44,17.76 72.26,17.76 72.26,10.78 88.27,10.78 88.27,-1.29
  pour Top (no thermals): 17.02,22.72 14.86,22.72 14.86,24.37 14.86,26.53 14.86,28.43 20.32,28.43 20.32,25.38 20.57,25.38 20.57,24.11 17.02,24.11
  pour Bottom (rank 2, no thermals): 113.92,-1.29 113.92,16.37 108.08,16.37 108.2,46.21 114.05,46.21 113.92,68.56 58.93,68.56 58.93,75.67 -4.7,75.67 -4.7,64.37 6.73,64.37 6.73,33.76 -4.7,33.76 -4.7,-1.03 8.51,-1.03 8.51,11.92 25.27,11.92 25.27,-1.29 51.44,-1.16 51.44,17.76 72.26,17.76 72.26,10.78 88.27,10.78 88.27,-1.29
  pour Route15 (rank 2, no thermals): 113.92,-1.29 113.92,16.37 108.08,16.37 108.08,34.53 113.92,34.53 113.92,68.56 58.8,68.56 58.8,75.67 -4.7,75.67 -4.7,64.37 6.73,64.37 6.73,33.76 -4.7,33.76 -4.7,-1.03 8.51,-1.03 8.51,11.92 25.27,11.92 25.27,-1.16 51.44,-1.16 51.44,17.76 72.26,17.76 72.26,10.78 88.27,10.78 88.27,-1.29
  pour Route2 (rank 2, no thermals): 113.92,-1.29 113.92,16.37 108.08,16.37 108.08,34.53 113.92,34.53 113.92,68.56 58.8,68.56 58.8,75.67 -4.7,75.67 -4.7,64.37 6.86,64.37 6.86,33.76 -4.7,33.76 -4.7,-1.03 8.51,-1.16 8.51,12.05 25.27,12.05 25.27,-1.16 51.44,-1.16 51.44,17.76 72.26,17.76 72.26,10.78 88.27,10.78 88.27,-1.29
GPIO1  (via drill 0.33)
  Top 0.254: v88.01,28.18 88.01,27.29 89.03,26.27 90.75,26.27 R15.1 | v35.69,59.55 35.69,57.86 U1.38
  Route15 0.254: v88.01,28.18 93.6,33.76 93.6,55.74 89.03,60.31 48.64,60.31 48.13,60.82 36.96,60.82 v35.69,59.55
GPIO6  (via drill 0.33)
  Top 0.254: U1.1 55.72,35.32 54.84,36.2 50.14,36.2 42.72,43.62 42.72,48.42 43.19,48.89 43.51,49.21 43.71,49.41 v49.22,49.41
  Bottom 0.254: R22.2 v49.22,49.41
GPIO7  (via drill 0.33)
  Top 0.254: U1.58 50.4,36.83 43.33,43.9 43.33,48.09 43.74,48.5 v50.34,48.5
  Bottom 0.254: v50.34,48.5 R37.2
GPIO8  (via drill 0.33 pad 0.61)
  Top 0.254: U1.3 v51.72,35.31 v51.71,35.31 | v45.39,37.52 45.39,38.06 40.74,42.71 v40.74,50.07
  Bottom 0.254: R12.2 48.08,49.61 47.83,49.36 46.1,49.36 45.39,50.07 v40.74,50.07 | v51.71,35.31 51.71,34.65 51.36,34.3 46.3,34.3 45.39,35.21 v45.39,37.52
GPIO14  (via drill 0.33 pad 0.61)
  Top 0.254: U1.40 v39.72,55.31 v39.73,55.3
  Bottom 0.254: v39.73,55.3 R18.2
GPIO15  (via drill 0.33 pad 0.61)
  Top 0.254: U1.41 41.72,55.24 v41.73,55.23
  Bottom 0.254: v41.73,55.23 41.73,54.03 R17.2
GPIO16  (via drill 0.33 pad 0.61)
  Top 0.254: U1.42 v43.72,55.16 v43.71,55.15
  Bottom 0.254: v43.71,55.15 R39.1
GPIO18  (via drill 0.33)
  Top 0.254: v26.92,40.37 22.46,44.83 U1.24
  Bottom 0.254: ROUTER.10 41.28,15.69 41.28,25 28.45,37.83 27.81,37.83 26.92,38.72 v26.92,40.37
GPIO19  (via drill 0.33)
  Top 0.254: v21.59,50.78 18.27,50.78 U1.27
  Bottom 0.254: ROUTER.6 36.27,28.1 27.81,36.56 27.3,36.56 25.78,38.08 25.78,38.97 25.4,39.35 25.4,41.89 22.86,44.43 22.86,49.51 v21.59,50.78
GPIO20  (via drill 0.33)
  Top 0.254: v21.08,46.72 20.97,46.83 U1.25
  Bottom 0.254: ROUTER.5 36.27,13.24 35.05,14.46 35.05,17.13 35.69,17.76 35.69,27.8 27.56,35.92 27.05,35.92 25.15,37.83 25.15,38.72 24.89,38.97 24.89,41.64 22.23,44.31 22.23,45.58 v21.08,46.72
GPIO21  (via drill 0.33)
  Top 0.254: v22.23,52.81 18.23,52.81 U1.28
  Bottom 0.254: ROUTER.8 40.51,17.32 40.51,24.75 28.07,37.19 27.56,37.19 26.29,38.46 26.29,39.35 25.91,39.73 25.91,42.15 23.37,44.69 23.37,51.67 v22.23,52.81
GPIO22  (via drill 0.33)
  Top 0.254: U1.23 20.02,42.83 20.83,42.02 21.21,41.64 21.46,41.38 v21.46,41.13 | ROUTER.7 37.47,14.42 37.47,17.25 36.07,18.65 v34.42,18.65
  Bottom 0.254: v34.42,18.65 35.05,19.29 35.05,27.54 27.3,35.29 26.8,35.29 21.46,40.62 v21.46,41.13
GPIO23  (via drill 0.33)
  Top 0.254: v24.77,48.62 18.43,48.62 U1.26
  Bottom 0.254: ROUTER.9 41.35,13.39 42.67,14.71 42.67,24.62 27.94,39.35 27.94,41 24.13,44.81 24.13,47.99 v24.77,48.62
GPIO24  (via drill 0.33)
  Top 0.254: U1.21 18.23,38.84 v29.97,38.84
  Bottom 0.254: ROUTER.12 43.94,15.67 43.94,24.11 29.97,38.08 v29.97,38.84
GPIO26  (via drill 0.33 pad 0.61)
  Top 0.254: U1.5 47.5,34.05 47.5,36.99 41.48,43.01 41.48,49.49 43.31,51.32 v44.14,51.32
  Bottom 0.254: R40.1 45.8,51.65 45.47,51.32 v44.14,51.32
GPIO27  (via drill 0.25, 0.33)
  Top 0.254: U1.4 49.66,33.89 v49.66,35.16 49.66,35.77 46.81,38.62 46.58,38.84 42.14,43.29 42.14,49.06 43.43,50.35 v46.94,50.35
  Bottom 0.254: v49.66,35.16 49.99,35.49 R11.2 | R26.1 v46.94,50.35
JUMPSTART  (via drill 0.33)
  Top 0.305: U1.57 58.53,38.83 v58.55,38.84
  Bottom 0.305: v58.55,38.84 58.8,38.84 59.06,38.59 59.06,29.19 60.58,27.67 70.36,27.67 70.61,27.41 71.14,27.41 C23.1 R27.2 72.19,26.73 73.91,25 73.91,14.33 76.45,11.79 88.14,11.79 89.41,10.52 94.62,10.52 96.9,8.24 96.9,1.9 S1.2
LAN_LED
  Top 0.254: U1.39 37.72,60.1 38.56,60.94 69.72,60.94 71.5,62.72 71.5,65.06 R21.1
LED_SYS
  Top 0.254: R25.1 80.52,63 77.88,60.36 48.74,60.36 47.72,59.33 U1.44
N$1
  Top 0.254: R25.2 SYS.A
N$2
  Top 0.406: J1.GND@1 18.67,4.21 18.67,4.17
  Top 2.184: J1.GND@2 19.74,4.17 18.67,4.17 18.03,4.17 17.65,4.55 L5.2
N$3
  Top 2.184: F1.2 22.91,14.16 26.92,10.14 26.92,8.57 L4.2
N$4
  Bottom 0.254: R11.1 48.66,39.64 T4.2
N$5
  Top 0.254: SCREW.7 39.32,63.07 38.81,63.58 38.81,67.98 38.18,68.61 32.72,68.61 31.8,69.52 X2.1
N$6
  Top 0.813: X2.7 10.8,68.99 16.71,63.08 SCREW.1
  Bottom 0.254: R39.2 43.71,52.33 43.18,51.8 41.63,51.8 40.77,52.66 40.77,55.76 40.08,56.45 33.02,56.45 32.46,57.01 SCREW.1
N$7
  Bottom 0.61: T1.13 56.83,11.94 R6.1
N$8
  Top 0.254: X1.6 38.8,71.54 40.58,69.77 40.92,69.43 41.35,68.99 41.35,63.51 41.79,63.07 SCREW.9
N$9
  Top 0.254: X1.4 45.8,70.65 43.89,68.74 43.89,63.61 44.42,63.08 SCREW.11
N$10
  Top 0.254: SCREW.13 47.07,63.07 46.41,63.74 46.41,68.41 49.22,71.23 50.97,71.23 X1.2
N$11
  Top 0.254: SCREW.12 45.16,68.92 X1.3
N$12
  Top 2.184: J1.PWR 18.62,13.94 F1.1
N$13
  Top 0.254: R20.2 86.24,66.82 SENSOR.C
N$14
  Top 0.254: SCREW.14 47.7,67.95 49.58,69.83 54.86,69.83 56.31,71.28 X1.1
N$16
  Top 0.305: Q1.1 88.39,22.84 87.5,21.95 87.5,21.42 R57.1 U3.3
N$17
  Top 0.61: U3.7 R10.1
N$18
  Top 0.305: U12.26 65.24,46.07 R86.1
N$19
  Top 0.406: Q1.3 91.06,24.87 R15.2 R14.2
N$20
  Top 0.61: U3.6 C58.2
N$22
  Top 0.305: R55.1 R56.2 80.31,22.99 U3.5
N$23
  Top 0.254: R19.2 WIFI.A
N$24
  Top 0.305: U2.1 7.16,33.15 C1.2
  Top 0.61: 7.37,37.5 L6.P$1 | C1.2 7.16,34.91 7.37,34.91
  Top 0.813: U2.1 7.62,32.95 7.62,37.07 7.28,37.07 L6.P$1
N$25
  Top 0.305: R46.2 4.83,35.03 U2.3
N$26
  Top 0.61: R7.1 6.1,24.82 U2.7
N$27
  Top 0.61: C1.1 6.1,35.09 U2.2
N$28
  Top 0.254: X1.7 35.3,70.01 35.84,69.48 38.79,69.48 40.08,68.18 SCREW.8
  Bottom 0.254: SCREW.8 41.05,65.61 41.33,65.34 41.33,62.36 45.39,58.3 48.23,58.3 49.22,57.31 R22.1
N$29
  Top 0.61: C57.1 R9.2
N$30
  Top 0.406: R21.2 LAN.C
N$31
  Top 0.61: C57.2 U2.6
N$32
  Top 0.61: R16.1 C58.1
N$34
  Top 0.406: U3.1 87.66,18.65 C17.2 91.8,19.08 L2.P$1
  pour Top (no thermals): 85.22,18.78 87.25,18.78 87.25,19.03 89.03,19.03 89.03,19.92 94.87,19.92 94.87,18.14 94.87,17.76 84.71,17.76 84.71,18.78
N$35
  Top 0.254: R24.2 PWR.C
N$36
  Top 0.254: SCREW.10 42.62,72.75 X1.5
  Bottom 0.254: SCREW.10 43.31,65.61 43.92,65.01 43.92,61.35 46.36,58.91 49.56,58.91 50.39,58.07 50.39,54.03 R37.1
N$39  (via drill 0.33)
  Top 0.203: v60.71,24.87 60.71,24.28 60.56,24.13 R33.2 | v57.15,24.49 C35.1
  Top 0.254: C35.1 R34.2
  Bottom 0.203: v60.71,24.87 60.33,24.49 v57.15,24.49
N$40  (via drill 0.33)
  Top 0.203: v54.74,24.49 54.74,24.03 R35.2 | v51.82,24.49 51.79,24.49 C36.1
  Top 0.254: C36.1 R36.2
  Bottom 0.203: v54.74,24.49 v51.82,24.49
N$41
  Bottom 0.61: R1.2 72.14,7.09 72.81,6.42 74.27,6.42 J2.2-8
  Bottom 1.016: J2.2-8 74.55,6.14 74.55,5.19 75.1,4.64 75.29,4.64 J2.2-7
N$42
  Bottom 0.61: J2.2-4 78.57,7.27 76.94,8.9 R2.2
  Bottom 1.016: J2.2-5 77.55,4.88 78.11,5.44 78.11,5.75 J2.2-4
N$43  (via drill 0.25)
  Top 0.203: v70.61,24.75 70.61,24.03 R29.2 C33.1 | v68.58,24.75 68.68,24.64 R30.2
  Bottom 0.203: v70.61,24.75 v68.58,24.75
N$44  (via drill 0.33)
  Top 0.203: C34.1 R31.2 64.77,24.16 v64.77,24.75 | R32.2 62.71,24.64 v62.48,24.87
  Bottom 0.203: v62.48,24.87 64.64,24.87 v64.77,24.75
N$45
  Bottom 0.61: T1.18 66.83,12.53 69.22,10.14 71.89,10.14 R3.1
N$46
  Bottom 0.61: R3.2 73.04,9.9 R1.1 75.28,8.91 R2.1 75.31,8.92 75.31,10.14 75.37,10.2 81.19,10.2 C6.1
N$49
  Top 0.305: R41.2 R8.1 2.79,27.14 3.56,27.14 U2.5
N$50
  Bottom 0.254: R17.1 42.44,53.09 42.65,53.3 42.65,56.65 41.89,57.41 34.47,57.41 33.73,58.15 33.73,65.29 34.06,65.61 SCREW.4 35,66.38 34.16,67.22 22.81,67.22 21.3,68.72 X2.4
N$51
  Bottom 0.61: R5.2 58.09,6.85 J2.1-8
  Bottom 1.016: J2.1-7 59.56,4.43 58.8,5.19 58.8,6.14 J2.1-8
N$52
  Bottom 0.61: J2.1-4 62.82,8.04 R4.2
  Bottom 1.016: J2.1-5 61.8,4.88 62.36,5.44 62.36,5.75 J2.1-4
N$53
  Bottom 0.254: R12.1 48.08,56.98 47.47,57.59 44.96,57.59 41.61,60.94 39.67,60.94 38.81,61.81 38.81,65.29 38.48,65.61 SCREW.6 37.54,67.29 36.2,68.64 29.77,68.64 28.3,70.1 X2.2
N$54
  Bottom 0.61: R6.2 59,9.96 58.8,9.76 | 58.8,9.76 56.37,9.76 C7.1 | R5.1 59,9.56 | 59,9.56 58.8,9.76 | R4.1 59.08,9.63 59,9.56
N$55
  Top 0.61: C17.1 85.55,20 U3.2
N$58
  Top 0.254: X2.5 17.8,66.05 19.46,64.4 34.59,64.4 35,63.99 SCREW.3
  Bottom 0.254: SCREW.3 35,62.9 34.52,62.42 34.52,58.68 34.95,58.25 42.39,58.25 45.8,54.85 R40.2
N$59
  Bottom 0.254: R26.2 46.94,56.09 46.25,56.78 44.93,56.78 41.68,60.03 38.5,60.03 37.54,60.99 SCREW.5 36.83,63.08 36.27,63.63 36.27,66.94 35.05,68.16 25.65,68.16 24.8,69.01 X2.3
N$109  (via drill 0.33)
  Top 0.305: U12.14 73.24,39.32 v73.41,39.48
  Bottom 0.305: v73.41,39.48 73.41,38.77 R81.2
N$111  (via drill 0.33)
  Top 0.254: U12.17 70.99,44.55 70.99,45.58 72.01,46.59 v73.91,46.59
  Bottom 0.305: R82.1 69.14,48.8 69.85,49.51 72.9,49.51 73.91,48.5 v73.91,46.59
N$112  (via drill 0.33)
  Top 0.305: U12.19 69.72,46.72 v69.98,46.97
  Bottom 0.305: R83.1 69.19,47.76 v69.98,46.97
N$113  (via drill 0.33)
  Top 0.254: U12.18 70.36,45.83 72.01,47.48 v73.03,47.48
  Bottom 0.254: 72.42,47.63 R85.1 | R85.1 R84.2 | R85.1 72.87,47.63 v73.03,47.48
P0_R_N
  Top 0.203: T1.17 64.11,12.93 64.11,11.25 65.12,10.24 69.56,10.24 70.96,8.85 74.92,8.85 76.53,7.24 J2.2-6
P0_R_P
  Top 0.203: T1.16 63.65,12.81 63.65,11.06 64.93,9.79 69.37,9.79 70.77,8.39 74.73,8.39 75.51,7.61 75.51,5.62 75.69,5.44 75.82,5.44 75.95,5.32 76.07,5.32 76.2,5.19 76.83,5.19 76.96,5.32 77.09,5.32 77.22,5.44 77.98,5.44 78.23,5.19 78.82,5.19 J2.2-3
P0_RX_N
  Top 0.203: 63.83,23.09 63.83,25.34 62.95,26.22 59.78,26.22 58.12,27.87 32.85,27.87 30.81,29.91 30.81,31.86 31.72,32.77 U1.13 | 63.83,23.09 63.83,22.26 T1.4 | R31.1 63.83,23.09
P0_RX_P
  Top 0.203: 63.42,23.1 63.42,25.17 62.78,25.81 59.61,25.81 57.95,27.46 32.68,27.46 30.4,29.74 30.4,31.86 29.72,32.54 U1.14 | 63.42,23.1 63.42,21.86 T1.5 | R32.1 63.42,23.09 63.42,23.1
P0_T_N
  Top 0.203: T1.20 70.05,12.87 70.05,12.24 71.44,10.85 77.36,10.85 80.04,8.18 80.04,6.78 J2.2-2
P0_T_P
  Top 0.203: T1.19 69.6,12.87 69.6,12.05 71.25,10.4 77.17,10.4 79.58,7.99 79.58,5.75 80.01,5.32 80.26,5.32 80.52,5.06 80.99,5.06 J2.2-1
P0_TX_N
  Top 0.203: 69.8,23.1 69.8,26.23 68.79,27.24 60.66,27.24 60.6,27.3 60.53,27.37 59.01,28.89 35.64,28.89 34.88,29.66 34.88,31.61 35.72,32.45 U1.11 | 69.8,23.1 69.8,22.29 T1.1 | R29.1 69.8,23.1
P0_TX_P
  Top 0.203: 69.39,22.97 69.39,26.06 68.62,26.83 60.49,26.83 60.31,27.02 59.8,27.52 58.84,28.48 35.48,28.48 34.47,29.49 34.47,31.61 33.72,32.35 U1.12 | 69.39,22.97 69.39,21.83 T1.2 | R30.1 68.68,22.97 69.39,22.97
P4_R_N
  Top 0.203: T1.12 54.83,13.05 54.08,12.3 54.08,10.49 55.21,9.36 58.26,9.36 60.78,6.84 J2.1-6
P4_R_P
  Top 0.203: T1.11 52.83,13.1 53.62,12.3 53.62,10.3 55.02,8.9 58.07,8.9 59.72,7.25 59.72,5.67 60.07,5.32 60.33,5.32 60.45,5.19 61.21,5.19 61.47,5.44 62.1,5.44 62.36,5.19 63.12,5.19 63.84,4.47 J2.1-3
P4_RX_N
  Top 0.127: 21.68,29.27 | 21.68,29.27
  Top 0.203: 53.92,23.09 53.92,24.83 52.92,25.84 31.71,25.84 28.28,29.27 21.68,29.27 | 53.92,23.09 53.92,21.83 54.49,21.26 T1.9 | R35.1 53.92,23.09 | U1.18 21.72,32.42 20.91,31.61 20.91,29.79 21.42,29.27 21.68,29.27
P4_RX_P
  Top 0.203: 53.52,23.09 53.52,24.66 52.75,25.43 31.54,25.43 28.11,28.86 21.25,28.86 20.5,29.62 20.5,31.61 19.72,32.38 U1.19 | 53.52,23.09 53.52,21.83 52.95,21.26 T1.10 | R36.1 53.52,23.09
P4_T_N
  Top 0.203: T1.15 60.05,12.86 60.05,10.68 61.25,9.48 63.09,9.48 64.86,7.71 J2.1-2
P4_T_P
  Top 0.203: T1.14 59.59,12.88 59.59,10.49 61.06,9.02 62.9,9.02 63.82,8.1 63.82,5.76 64.26,5.32 64.39,5.32 64.64,5.06 65.24,5.06 J2.1-1
P4_TX_N
  Top 0.203: 59.77,22.97 59.77,22.32 T1.6 | R33.1 59.89,23.09 59.77,22.97 | 59.77,22.97 59.77,24.58 58.63,25.71 54.7,25.71 53.55,26.86 32.22,26.86 32.15,26.92 31.83,27.24 28.79,30.29 25.48,30.29 24.97,30.8 24.97,31.61 25.72,32.36 U1.16
P4_TX_P
  Top 0.203: 59.36,23.09 59.36,21.8 T1.7 | R34.1 59.36,23.09 | 59.36,23.09 59.36,24.41 58.46,25.31 54.53,25.31 53.38,26.45 32.05,26.45 31.86,26.64 31.67,26.83 28.62,29.88 25.32,29.88 24.56,30.63 24.56,31.61 23.72,32.45 U1.17
SENSOR_LED  (via drill 0.33)
  Top 0.254: ROUTER.16 48.97,23.04 v49.4,23.48 | v59.69,50.15 59.69,56.75 62.74,59.8 79.88,59.8 R20.1
  Bottom 0.254: v49.4,23.48 49.4,27.29 54.36,32.24 54.36,44.81 v59.69,50.15
UART_RX  (via drill 0.33)
  Top 0.254: v29.72,55.86 U1.35
  Route15 0.254: ROUTER.13 46.49,13.07 47.75,14.33 47.75,30.21 46.86,31.1 46.86,44.31 45.09,46.08 v44.45,46.08
  Bottom 0.254: U6.3 44.84,45.7 v44.45,46.08 44.07,45.7 36.7,45.7 29.72,52.69 v29.72,55.86
UART_TX  (via drill 0.33)
  Top 0.254: v27.81,55.86 27.81,57.74 U1.34
  Route15 0.254: ROUTER.14 46.43,16.44 47.24,17.25 47.24,29.83 46.36,30.72 46.36,41.89 45.34,42.91 45.34,43.67 v44.45,44.56
  Bottom 0.254: U6.2 44.45,45.2 | v44.45,44.56 44.45,45.2 | 44.45,45.2 35.68,45.2 27.69,53.2 27.69,55.74 v27.81,55.86
USB1_N
  Top 0.191: BEE-CON-1.8 75.3,30.65 73.45,30.65 69.91,34.19 69.91,38.41 69.72,38.59 U12.10 | U12.10
USB1_P
  Top 0.191: BEE-CON-1.7 75.35,31.04 73.61,31.04 70.3,34.35 70.3,39.26 U12.11
USB2_N
  Top 0.191: U12.8 68.44,40.13 69.89,41.58 72.82,41.58 73.72,42.48 73.72,45.15 74.72,46.15 77.68,46.15 82.25,41.58 91.99,41.58 96.18,45.77 100.71,45.77 | 100.71,45.77 102.93,45.77 106.14,42.56 106.14,38.74 104.96,37.56 103.65,37.56 USB2.2 | D7.P$2 100.71,45.77
USB2_P
  Top 0.191: U12.9 69.08,40.21 70.06,41.19 72.98,41.19 74.11,42.32 74.11,44.99 74.89,45.76 77.52,45.76 82.09,41.19 92.16,41.19 96.35,45.38 100.84,45.38 | 100.84,45.38 102.76,45.38 105.75,42.4 105.75,38.9 104.8,37.95 103.68,37.95 USB2.3 | D9.P$2 100.71,45.25 100.84,45.38
USB3.3  (via drill 0.33)
  Top 0.254: 67.69,46.85 67.44,46.59 v67.18,46.59 66.95,46.36 R86.2 | U12.13 71.64,40.35 v71.63,40.37
  Top 0.305: U12.13 71.64,37.61 C5.1 | U12.21 68.44,45.97 67.69,46.72 67.69,46.85 67.69,47.49 C4.1
  Bottom 0.254: v71.63,40.37 71.63,40.5 68.45,43.67 68.45,45.83 67.69,46.59
  Bottom 0.305: v67.18,46.59 67.69,46.59 67.84,46.59 68.25,47 R83.2 68.22,47.79 R82.2
USB3_N
  Top 0.191: U12.6 67.16,38.46 68.51,37.11 68.51,34.23 65.84,31.56 65.84,30.52 USB3.2
USB3_P
  Top 0.191: U12.7 67.8,38.38 68.9,37.28 68.9,34.06 66.24,31.4 66.24,30.72
  Top 0.203: 66.24,30.72 66.24,30.52 USB3.3
USB_GND  (1 unrouted)
USB_N
  Top 0.191: 60.78,37.62 60.78,40.03 62.82,42.08 68.28,42.08 68.92,42.71 71.58,42.71 72.28,43.41 U12.15
  Top 0.203: 60.78,37.62 60.78,31.26 59.78,30.26 41.44,30.26 40.44,31.27 40.44,32.57 39.75,33.26 39.75,33.8 U1.9
USB_P
  Top 0.191: 60.38,37.78 60.38,40.2 62.66,42.47 68.12,42.47 68.75,43.11 71.19,43.11 71.63,43.54 71.63,44.52 U12.16
  Top 0.203: 60.38,37.78 60.38,31.44 59.61,30.67 41.61,30.67 40.84,31.44 40.84,32.95 U1.8
VCC18  (via drill 0.33)
  Top 0.191: 71.75,35.8 71.95,35.99 C12.1 71.78,36.15
  Top 0.254: C11.1 63.96,44.92 U12.28 63.61,44.54 v63.37,44.31 | v71.75,35.29 71.75,35.8 71.75,35.84 | 71.78,36.15 70.99,36.94 70.99,39.31 U12.12
  Bottom 0.254: v63.37,44.31 66.93,44.31 70.36,40.88 70.36,40.37 70.99,39.73 70.99,36.05 v71.75,35.29
VIN  (via drill 0.33)
  Top 0.305: R46.1 3.84,35.95 v3.56,35.67 | v8.64,24.37 8.89,24.62 8.89,25.28 | 7.87,27.41 7.37,27.41 U2.8 | R57.2 v89.41,21.19 | v78.74,17.51 78.74,18.52 78.87,18.65
  Top 0.406: 77.75,17 77.75,18.65 78.87,18.65 U3.8
  Top 1.27: ROUTER.15 49.21,13.32 50.67,13.32 50.8,13.44 50.8,15.35 54.48,19.03 72.9,19.03 72.9,17 77.75,17 C22.1 78.76,13.62 C56.1 | 16.26,18.02 C14.+ 16.26,20.15 U5.3
  Top 1.422: 7.87,27.41 7.87,26.4 7.75,26.4 7.75,25.28 8.89,25.28 C53.1 C19.1 12.83,18.02 16.26,18.02
  Top 1.676: ROUTER.15 48.97,8.11 36.7,8.11 33.07,4.48 L4.1 31.24,4.48 31.24,9.76 25.78,15.22 25.78,17.76
  Top 1.778: 25.78,17.76 25.78,18.02 16.26,18.02
  Bottom 0.305: v8.64,24.37 7.49,25.51 7.49,31.48 3.56,35.42 v3.56,35.67 | v89.41,21.19 84.71,21.19 81.66,18.14 79.38,18.14 v78.74,17.51
  pour Top (no thermals): 72.52,18.91 80.65,18.91 80.65,17.89 79.5,17.89 79.5,12.68 77.47,12.68 77.47,16.24 72.52,16.24
WAN_LED  (via drill 0.25)
  Top 0.254: v64.59,64.04 64.59,65.12 R23.1 | U1.43 45.72,59.32 46.28,59.88 v47.02,59.88
  Bottom 0.254: v47.02,59.88 64.11,59.88 64.59,60.36 v64.59,64.04
WLAN_LED
  Top 0.254: U1.37 33.72,60.96 34.31,61.55 58.32,61.55 59.84,63.08 59.84,65.01 R19.1
YELLOW
  Top 0.254: R23.2 WAN.C

## Text on the board
tPlace: SYS | BEE-VIN | BEE_TXD | BEE_RXD | 5V | USB3+ | 3.3V | USB3- | USB1+ | GND | USB1- | BEE-VIN | GND | LDO_5V | VDD3.3V | GND | GPIO19 | GPIO21 | GPIO18 | GPIO24 | TXD | SENSOR | RESET | GPIO20 | GPIO22 | GPIO23 | GND | RXD | RAW_VCC
tDocu: SIM | IoT Base Board | Model: IBB-v1.0
214bmp: D:/SmartProjects/Snc/a4_bn_logo2.bmp